# Altium PCB Driver Morpheus CENTRAL.PcbDoc
Units mil, origin at the board's own origin, x right, y up, seen from the top; angles counter-clockwise.
Board outline 6000 x 4000 mil, 2 copper layers (Top Layer, Bottom Layer); 13 components, 29 nets, 36 pads, 0 vias.
Unrouted connection lines stored in the file: 11.
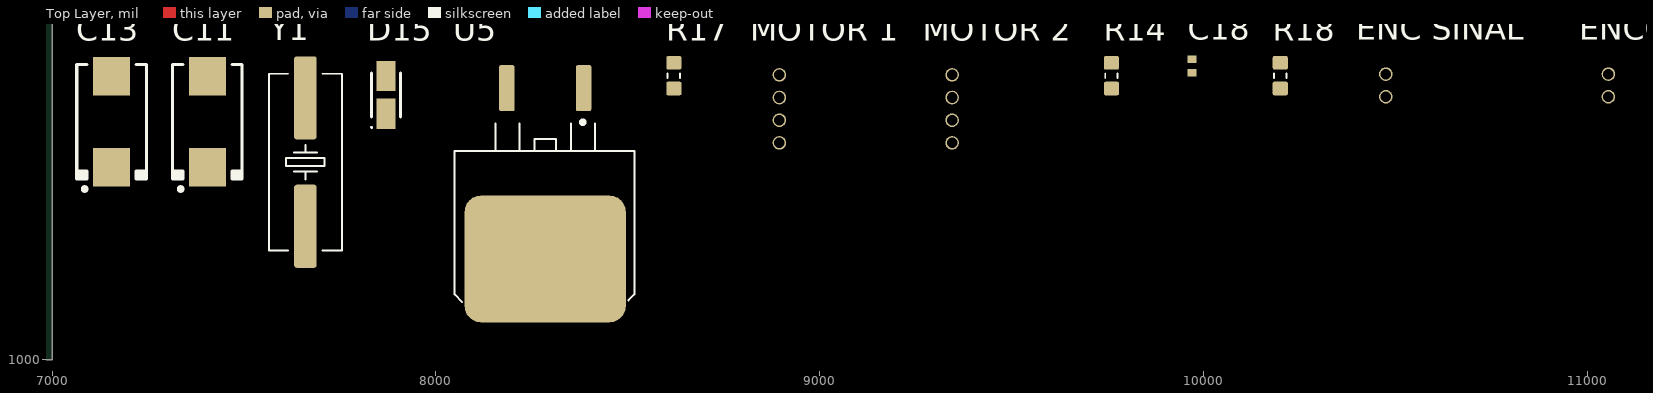
[diagram p0: Top Layer view]
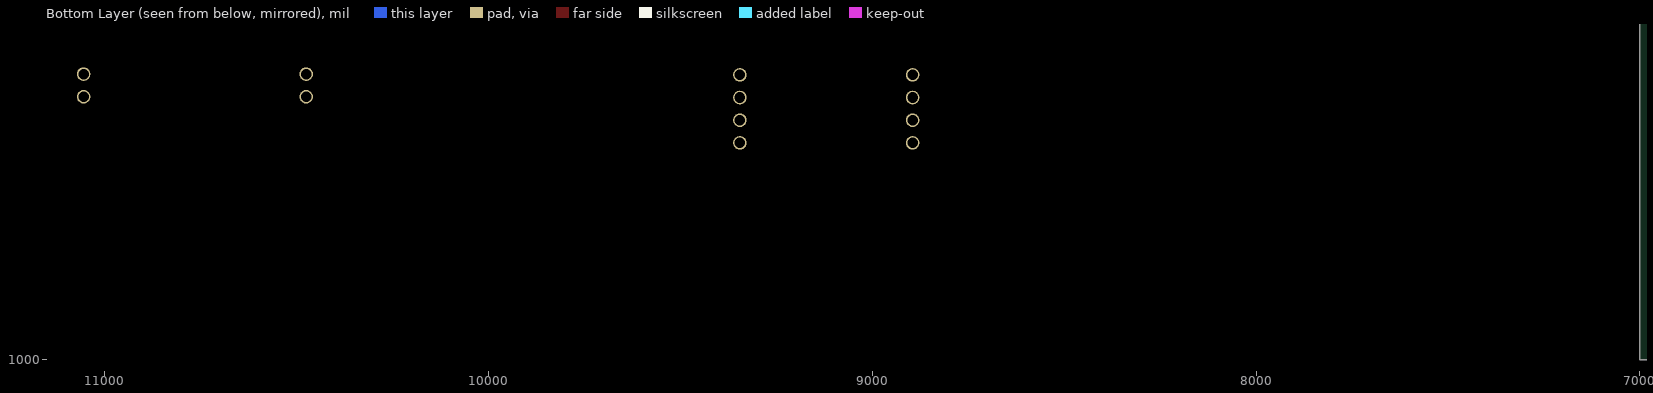
[diagram p1: Bottom Layer view, seen from below]

## Layer stack, top to bottom
Top Solder: solder mask 0.4, Solder Resist, Dk 3.5
Top Layer: signal copper 1.4
Dielectric 1: dielectric 12.6, FR-4, Dk 4.8
Bottom Layer: signal copper 1.4
Bottom Solder: solder mask 0.4, Solder Resist, Dk 3.5

## Board outline
1000,1000 7000,1000 7000,5000 1000,5000

## Design rules (kind name [scope] priority, off if disabled: settings)
Clearance [All] p1: gap=10 ignorepadtopadclearanceinfootprint=FALSE except(0: Arc-Hole Track-Hole SMDPad-Hole THPad-Hole Via-Hole Fill-Hole Poly-Hole Region-Hole Text-Hole)
PolygonConnect [All] p1: connectstyle=Relief reliefconductorwidth=10 reliefentries=4 polygonreliefangle="90 Angle" airgapwidth=10
RoomDefinition "Driver Morpheus CENTRAL" [InComponentClass('Driver Morpheus CENTRAL')] p1: confinementstyle=ConfineIn formatcopy=TRUE lockcomponents=FALSE outline 7045,1065 11685,1065 11685,1910 7045,1910
RoutingVias [All] p1: holewidth=28 width=50 viastyle="Through Hole" minholewidth=28 minwidth=50 maxholewidth=28 maxwidth=50
SolderMaskExpansion [All] p1: expansion=4
Width [All] p1: maxlimit=10 minlimit=10 preferedwidth=10
30 further rules are at their usual default settings.

## Components (designator, comment, footprint, x,y, rotation, side; value= is the part's Value field where it differs from the comment)
C11 "Cap_10u_35v" "CAP POL 2917/7343" 7405,1620 r90 top
C13 "Cap_10u_35v" "CAP POL 2917/7343" 7155,1620 r90 top
C18 "GRM155R71C104KA88D" CAP-0402 9970,1765 r90 top value=100nF
D15 "100V; 1.5A" DIOM2818X18M 7870,1690 r90 top value="Vf = 1.15V @ 1.5A (Max)"
"ENC SINAL" "B2B-ZR" B2B-ZR 10475,1685 r90 top
"ENCODER ALIM" "B2B-ZR" B2B-ZR 11055,1685 r90 top
"MOTOR 1" "B4B-ZR" B4B-ZR 8895,1565 r90 top
"MOTOR 2" "B4B-ZR" B4B-ZR 9345,1565 r90 top
R14 "Thick Film" RESC1608X55N 9760,1740 r90 top value=220R
R17 "Thick Film" RESC1608X55N 8620,1740 r90 top value=220R
R18 "Thick Film" RESC1608X55N 10200,1740 r90 top value=10K
U5 "L7805" D2PAK-3 8285,1485 r90 top
Y1 "16MHz" CRYSTAL_HC49-US-SM 7660,1515 r90 top

## Footprints (in the part's own frame and the unit in brackets; to place one, negate y for a bottom-side part, rotate by r counter-clockwise, add the part's x,y. Pads: shape width x height; smd on the part's side, far side on the other; paste and mask are expansions set on the pad)
B2B-ZR [mm]
  round 0.9 hole 0.7: 1(0,0) 2(1.5,0)
  body extent -1.5,-1.3 3,2.2, height 4.5
B4B-ZR [mm]
  round 0.9 hole 0.7: 1(0,0) 2(1.5,0) 3(3,0) 4(4.5,0)
  body extent -1.5,-1.3 6,2.2, height 4.5
"CAP POL 2917/7343" [mm] "Molded Capacitor, 2-Leads, Body 7.30x4.30mm, IPC Medium Density"
  rect 2.55x2.45 smd: 1(-3.025,0) 2(3.025,0)
  silkscreen extent -4.57,-2.3 3.8,2.3, body extent -3.65,-2.15 3.65,2.15, height 4.1
CAP-0402 [mm]
  rect 0.5x0.62 smd: 1(-0.44,0) 2(0.44,0)
  body extent -0.53,-0.28 0.53,0.27, height 0.55
CRYSTAL_HC49-US-SM [mm] "SMD Crystal HC49/US-SM package"
  round 0.508 on Mech15: 0(0,0)
  rrect25% 5.5x1.5 smd: 1(-4.25,0) 2(4.25,0)
  silkscreen extent -5.84,-2.41 5.84,2.41, body extent -6.4,-2.41 6.4,2.42, height 4.29
D2PAK-3 [mil] "D-PAK/TO-263-3; 3 Leads (1 Cropped); Body 14.7 (inc. leads) x 10.2 mm (LxW max)"
  round 20 on Mech15: 0(0,0)
  rrect25% 120x40 smd: 1(222.5,-100) 3(222.5,100)
  rrect25% 330x420 smd: 4(-222.5,0)
  silkscreen extent -335,-232 139,236, body extent -361,-197 256,197, height 189
DIOM2818X18M [mm] "Molded Diode, 2-Leads, Body 2,80x1,80mm, IPC Low Density"
  rect 2x1.25 smd: A(1.25,0) K(-1.25,0)
  silkscreen extent -2.2,-0.95 1.45,1, body extent -1.45,-0.95 1.45,0.95, height 1.8
RESC1608X55N [mm] "Chip Resistor, Body 1.6x0.8mm, EIA 0603, IPC Medium Density"
  round 0.254 on Mech15: 0(0,0)
  rrect25% 0.9x1 smd: 1(-0.85,0) 2(0.85,0)
  Top Layer pour cut-out: -0.6,0.5 -0.4,0.7 0.4,0.7 0.6,0.5 0.6,-0.5 0.4,-0.7 -0.4,-0.7 -0.6,-0.5
  silkscreen extent -0.15,-0.41 0.15,0.41, body extent -0.87,-0.47 0.88,0.48, height 0.54

## Part data
C18: library part "Cap 100nF 0402", "0.10µF 16V Ceramic Capacitor X7R 0402 (1005 Metric) 0.039\" L x 0.020\" W (1.00mm x 0.50mm)"
D15: library part DIODE_100V_1.5A_SMA, "Diode SMD 100V 1.5A SMA", Manufacturer 1="Diodes Inc", Manufacturer Part Number 1=S2BA-13-F, Package / Case="DO-214AC, SMA", Supplier Part Number 1=S2BA-FDICT-ND, Diode Type=Standard, Material=Si, Ratings="100V; 1.5A", SCDType=source, Supplier 1=Digi-Key
R14 R17: library part RES_220R_0603_5%, "Resistor SMD chip 220 Ohm 0.1W 5% 0603", Manufacturer 1=Yageo, Manufacturer 2="Panasonic Electronic Components", Manufacturer 3="Stackpole Electronics Inc", Manufacturer 4="Rohm Semiconductor", Manufacturer 5="Royal Ohm", Manufacturer Part Number 1=RC0603JR-07220RL, Manufacturer Part Number 2=ERJ-3GEYJ221V, Manufacturer Part Number 3=RMCF0603JT220R, Manufacturer Part Number 4=MCR03ERTJ221, Manufacturer Part Number 5=0603WAJ0221, Package / Case="0603 (1608 metric)", Ratings="1/10 W", Supplier Part Number 1=311-220GRCT-ND, Tolerance=±5%, ComponentLink1Description=http://www.yageo.com/documents/recent/PYu-RC0603_51_RoHS_L_4.pdf, ComponentLink1URL=http://www.yageo.com/documents/recent/PYu-RC0603_51_RoHS_L_4.pdf, ComponentLink2Description=http://industrial.panasonic.com/www-cgi/jvcr13pz.cgi?E+PZ+3+AOA0001+ERJ3GEYJ221V+7+WW, ComponentLink2URL=http://industrial.panasonic.com/www-cgi/jvcr13pz.cgi?E+PZ+3+AOA0001+ERJ3GEYJ221V+7+WW, ComponentLink3Description=http://www.seielect.com/Catalog/SEI-RMCF_RMCP.pdf, ComponentLink3URL=http://www.seielect.com/Catalog/SEI-RMCF_RMCP.pdf, ComponentLink4Description=http://rohmfs.rohm.com/en/products/databook/datasheet/passive/resistor/chip_resistor/mcr_g.pdf, ComponentLink4URL=http://rohmfs.rohm.com/en/products/databook/datasheet/passive/resistor/chip_resistor/mcr_g.pdf, Material="Thick Film", RoHS 1="RoHS Compliant", RoHS 2="RoHS Compliant", RoHS 3="RoHS Compliant", RoHS 4="RoHS Compliant", SCDType=spec, Supplier 1=Digi-Key, Supplier 2=Digi-Key, Supplier 3=Digi-Key, Supplier 4=Digi-Key, Supplier Part Number 2=P220GCT-ND, Supplier Part Number 3=RMCF0603JT220RCT-ND, Supplier Part Number 4=RHM220CGCT-ND
R18: library part RES_10K_0603_1%, "Resistor SMD chip 10k Ohm 0.1W 1% 0603", Manufacturer 1=Yageo, Manufacturer Part Number 1=RC0603FR-0710KL, Package / Case="0603 (1608 Metric)", Ratings=1/10W, Supplier Part Number 1=311-10.0KHRCT-ND, Tolerance=±1%, SCDType=spec, Supplier 1=Digi-Key
U5: library part LM7805
Y1: library part XTAL, "Crystal Oscillator", LatestRevisionDate=17-Jul-2002, LatestRevisionNote="Re-released for DXP Platform.", PackageDescription="Crystal, Thru-Hole; 2 Leads; Body 3.1 x 8.2 mm (Dia.xH)", PackageReference=R38, Published=8-Jun-2000, Publisher="Altium Limited"

## Nets (pads, with @x,y where several pads share a name; then routed paths per layer and width w, separated by ;. In a path a pad name is that pad's centre, name@x,y a point inside that pad or via, vN(x,y) a via of type N, cw(c..) or ccw(c..) an arc to the next point about the centre after c; other vN are vias at no path point)
+5v: "ENCODER ALIM.1" C13.2 C18.1 R18.1 U5.3
"BEC 8.4v": D15.A
ENC_1A: "ENC SINAL.1"
ENC_1B: "ENC SINAL.2"
GND: "ENCODER ALIM.2" C13.1 C18.2 R14.2 R17.2
IN_1A: "MOTOR 1.1"
IN_1B: "MOTOR 2.1"
IN_2A: "MOTOR 1.2"
IN_2B: "MOTOR 2.2"
NetC10_2: D15.K U5.1
NetC19_2: Y1.2
NetC20_2: Y1.1
NetDS1_2: R14.1
NetDS4_1: 
NetDS4_2: R17.1
PIN_ESC: 
PROG_1: 
PROG_2: 
PROG_3: 
PROG_4: R18.2
REC_1: 
REC_2: 
REC_3: 
REC_4: 
REC_5: 
RX: 
SCL: "MOTOR 1.3" "MOTOR 2.3"
SDA: "MOTOR 1.4" "MOTOR 2.4"
TX: 
pads on no net: C11.1 C11.2 R14.0 R17.0 R18.0 U5.0 U5.4 Y1.0